# EAGLE board Qwiic_ATECC608A-Panel (EAGLE 9.5.1)
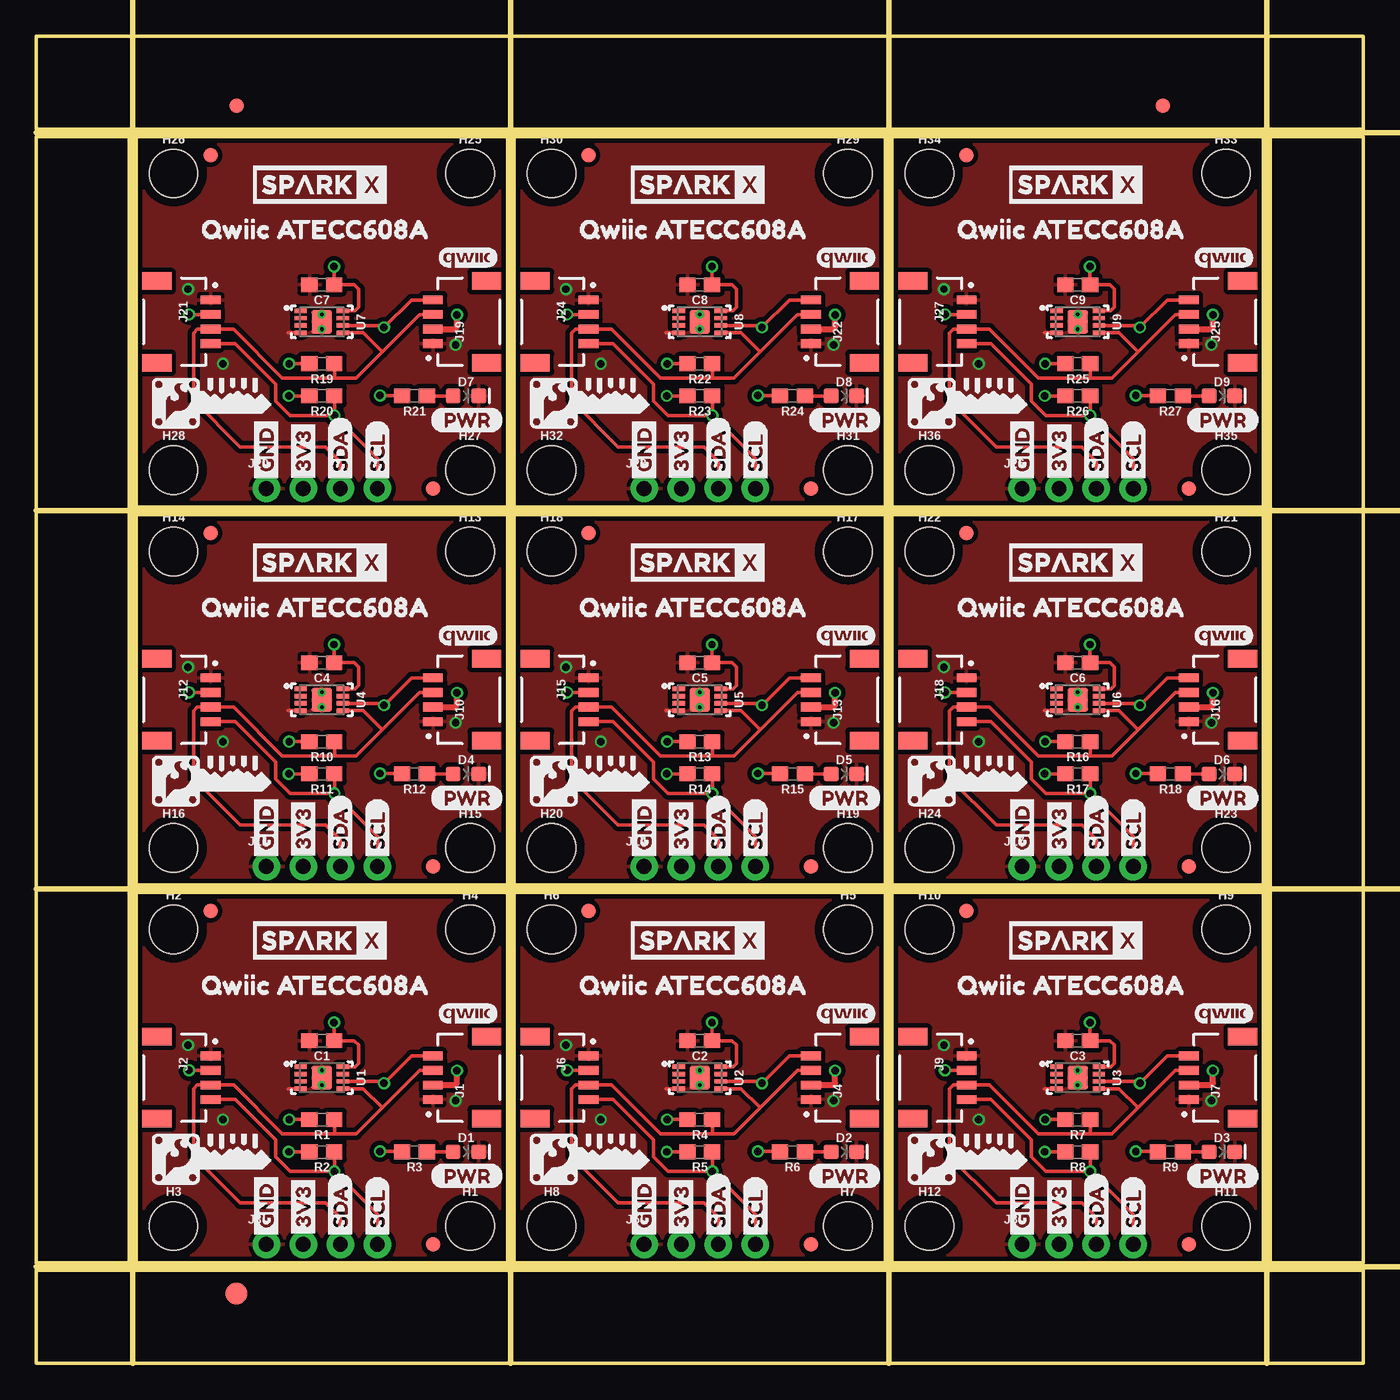
[diagram p0: board, top side]
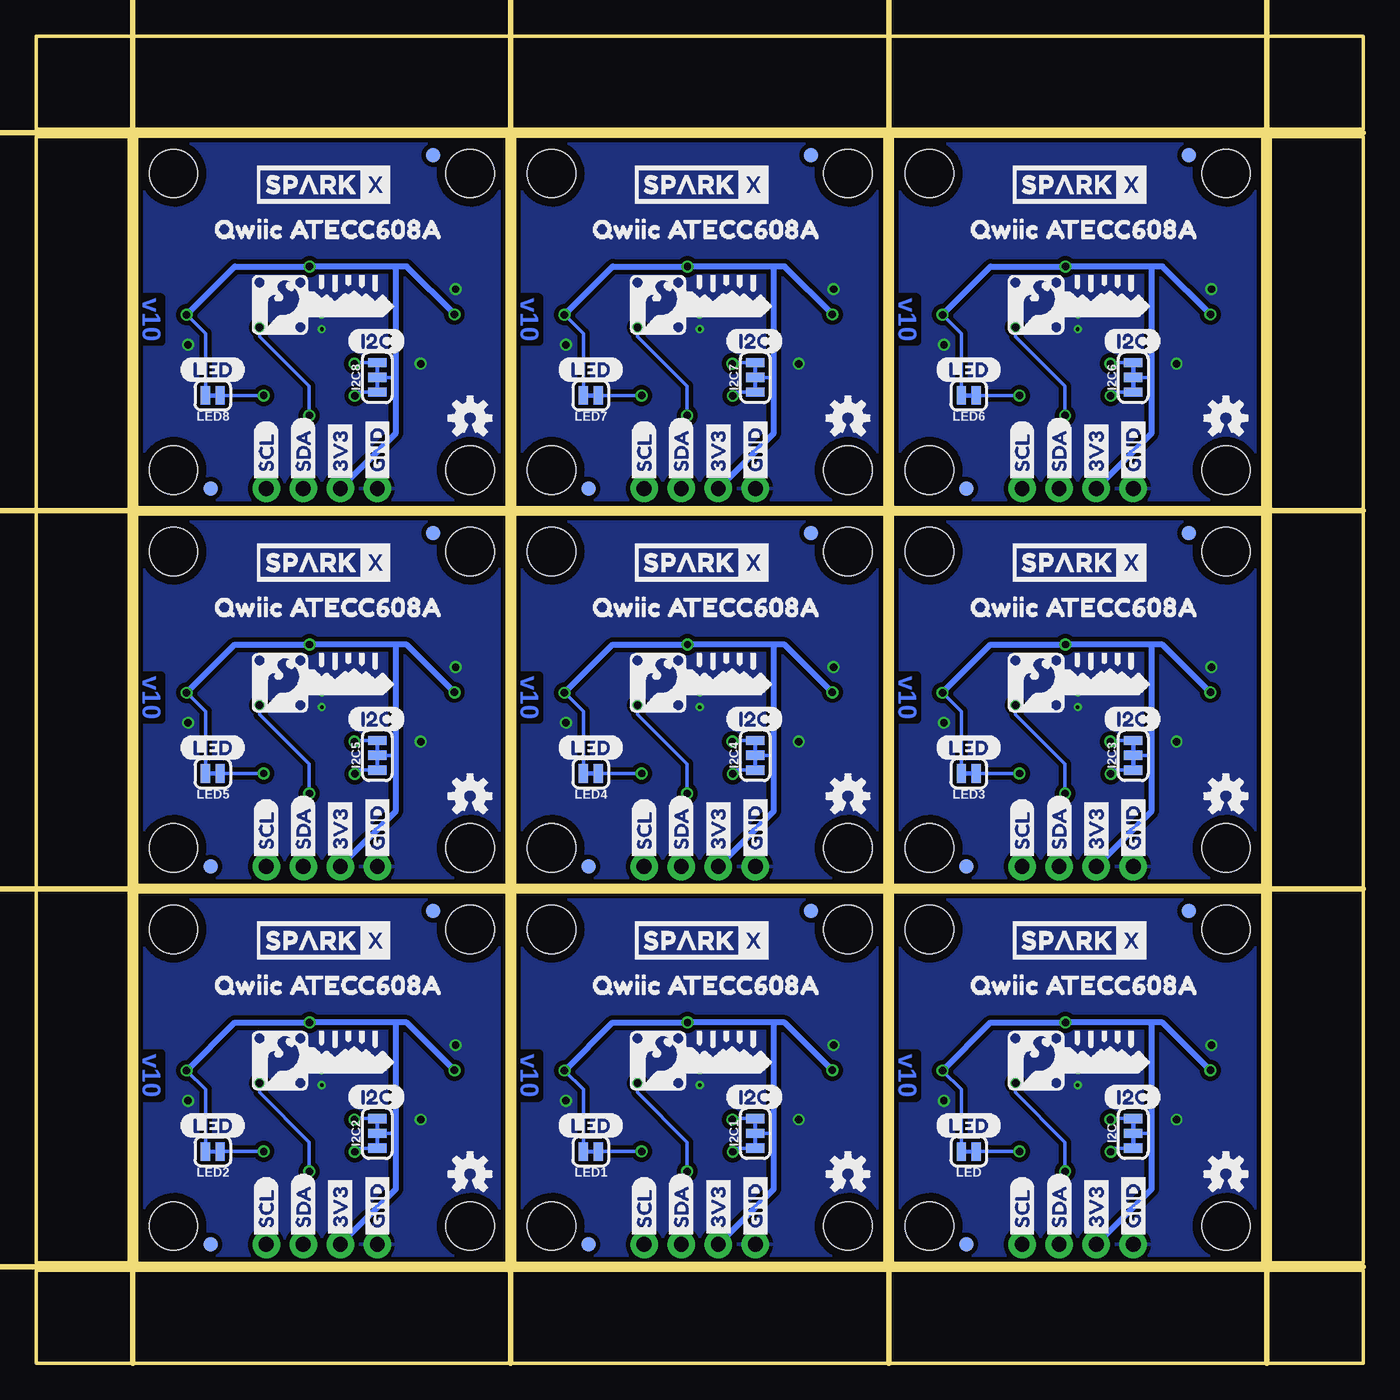
[diagram p1: board, bottom side, seen from below]

Size 90.93 x 90.93 mm. Coordinates in mm from the lower left corner, seen from the top.
Outline: 6.86,6.86 6.86,32.26 32.26,32.26 32.26,6.86 6.86,6.86
Outline: 32.77,6.86 32.77,32.26 58.17,32.26 58.17,6.86 32.77,6.86
Outline: 58.67,6.86 58.67,32.26 84.07,32.26 84.07,6.86 58.67,6.86
Outline: 6.86,32.77 6.86,58.17 32.26,58.17 32.26,32.77 6.86,32.77
Outline: 32.77,32.77 32.77,58.17 58.17,58.17 58.17,32.77 32.77,32.77
Outline: 58.67,32.77 58.67,58.17 84.07,58.17 84.07,32.77 58.67,32.77
Outline: 6.86,58.67 6.86,84.07 32.26,84.07 32.26,58.67 6.86,58.67
Outline: 32.77,58.67 32.77,84.07 58.17,84.07 58.17,58.67 32.77,58.67
Outline: 58.67,58.67 58.67,84.07 84.07,84.07 84.07,58.67 58.67,58.67
Outline: 0,6.35 90.93,6.35 90.93,0 0,0 0,6.35
Outline: 84.58,84.07 90.93,84.07 90.93,6.86 84.58,6.86 84.58,84.07
Outline: 0,90.93 90.93,90.93 90.93,84.58 0,84.58 0,90.93
Outline: 0,84.07 6.35,84.07 6.35,6.86 0,6.86 0,84.07
Copper layers (1*16): Top 0.035mm / dielectric 1.5mm / Bottom 0.035mm
Design rules "SparkFun-2-layer-PCBWay-LIMIT": minimum track width 6mil, minimum drill 0.3mm, track to track 6mil, track to pad 6mil, pad to pad 6mil, via to via 6mil, smd to smd 6mil, copper to edge 6mil, drill to drill 6mil, minimum pad ring 6mil, minimum via ring 6mil, stop-mask expansion 4mil, vias tented up to drill 25mil, thermal gap 10mil
tRestrict: area 17.9,18.6 to 18.3,18.6; area 43.8,18.6 to 44.2,18.6; area 69.7,18.6 to 70.1,18.6; area 17.9,44.5 to 18.3,44.6; area 43.8,44.5 to 44.2,44.6; area 69.7,44.5 to 70.1,44.6; area 17.9,70.4 to 18.3,70.5; area 43.8,70.4 to 44.2,70.5; area 69.7,70.4 to 70.1,70.5
Milling: 8 lines

## Footprints (pad centres in the part's own frame; a part is rotated, then mirrored left to right if it is on the bottom)
0603 = smd 1.1 x 1: 1 -0.85,0; 2 0.85,0
LED-0603 = smd 1 x 1: A -0.877,0; C 0.877,0
FIDUCIAL-1X2 = smd 1 x 1: 1 0,0
FIDUCIAL-1.5X3 = smd 1.5 x 1.5: 1 0,0
STAND-OFF = hole 3.302: 0,0
SMT-JUMPER_3_2-NC_TRACE_SILK = smd 0.635 x 1.27: 1 -1.016,0; 2 0,0; 3 1.016,0
JST04_1MM_RA = smd 0.6 x 1.35: 1 -1.5,0; 2 -0.5,0; 3 0.5,0; 4 1.5,0 | smd 1.2 x 2: NC1 2.8,-3.675; NC2 -2.8,-3.675
1X04_NO_SILK = drill 1.016 pad 1.88: 1 0,0; 2 2.54,0; 3 5.08,0; 4 7.62,0
SMT-JUMPER_2_NC_TRACE_SILK = smd 0.635 x 1.27: 1 -0.508,0; 2 0.508,0
UDFN_2X3MM = smd 0.3 x 0.85: 1 -0.75,-1.45; 2 -0.25,-1.45; 3 0.25,-1.45; 4 0.75,-1.45; 5 0.75,1.45; 6 0.25,1.45; 7 -0.25,1.45; 8 -0.75,1.45 | smd 1.6 x 1.4: P 0,0

## Placement (x,y rotation side)
C1  0.1uF  [0603]  19.56,22.1 180 top
C2  0.1uF  [0603]  45.47,22.1 180 top
C3  0.1uF  [0603]  71.37,22.1 180 top
C4  0.1uF  [0603]  19.56,48.01 180 top
C5  0.1uF  [0603]  45.47,48.01 180 top
C6  0.1uF  [0603]  71.37,48.01 180 top
C7  0.1uF  [0603]  19.56,73.91 180 top
C8  0.1uF  [0603]  45.47,73.91 180 top
C9  0.1uF  [0603]  71.37,73.91 180 top
D1  RED  [LED-0603]  29.44,14.48 0 top
D2  RED  [LED-0603]  55.35,14.48 0 top
D3  RED  [LED-0603]  81.25,14.48 0 top
D4  RED  [LED-0603]  29.44,40.39 0 top
D5  RED  [LED-0603]  55.35,40.39 0 top
D6  RED  [LED-0603]  81.25,40.39 0 top
D7  RED  [LED-0603]  29.44,66.29 0 top
D8  RED  [LED-0603]  55.35,66.29 0 top
D9  RED  [LED-0603]  81.25,66.29 0 top
E$1  [FIDUCIAL-1X2]  13.72,86.17 0 top
E$2  [FIDUCIAL-1X2]  77.22,86.17 0 top
E$3  [FIDUCIAL-1.5X3]  13.72,4.76 0 top
FD1  FIDUCIAL1X2  [FIDUCIAL-1X2]  11.94,30.99 0 top
FD2  FIDUCIAL1X2  [FIDUCIAL-1X2]  27.18,8.13 0 top
FD3  FIDUCIAL1X2  [FIDUCIAL-1X2]  27.18,8.13 0 bottom
FD4  FIDUCIAL1X2  [FIDUCIAL-1X2]  11.94,30.99 0 bottom
FD5  FIDUCIAL1X2  [FIDUCIAL-1X2]  37.85,30.99 0 top
FD6  FIDUCIAL1X2  [FIDUCIAL-1X2]  53.09,8.13 0 top
FD7  FIDUCIAL1X2  [FIDUCIAL-1X2]  53.09,8.13 0 bottom
FD8  FIDUCIAL1X2  [FIDUCIAL-1X2]  37.85,30.99 0 bottom
FD9  FIDUCIAL1X2  [FIDUCIAL-1X2]  63.75,30.99 0 top
FD10  FIDUCIAL1X2  [FIDUCIAL-1X2]  78.99,8.13 0 top
FD11  FIDUCIAL1X2  [FIDUCIAL-1X2]  78.99,8.13 0 bottom
FD12  FIDUCIAL1X2  [FIDUCIAL-1X2]  63.75,30.99 0 bottom
FD13  FIDUCIAL1X2  [FIDUCIAL-1X2]  11.94,56.9 0 top
FD14  FIDUCIAL1X2  [FIDUCIAL-1X2]  27.18,34.04 0 top
FD15  FIDUCIAL1X2  [FIDUCIAL-1X2]  27.18,34.04 0 bottom
FD16  FIDUCIAL1X2  [FIDUCIAL-1X2]  11.94,56.9 0 bottom
FD17  FIDUCIAL1X2  [FIDUCIAL-1X2]  37.85,56.9 0 top
FD18  FIDUCIAL1X2  [FIDUCIAL-1X2]  53.09,34.04 0 top
FD19  FIDUCIAL1X2  [FIDUCIAL-1X2]  53.09,34.04 0 bottom
FD20  FIDUCIAL1X2  [FIDUCIAL-1X2]  37.85,56.9 0 bottom
FD21  FIDUCIAL1X2  [FIDUCIAL-1X2]  63.75,56.9 0 top
FD22  FIDUCIAL1X2  [FIDUCIAL-1X2]  78.99,34.04 0 top
FD23  FIDUCIAL1X2  [FIDUCIAL-1X2]  78.99,34.04 0 bottom
FD24  FIDUCIAL1X2  [FIDUCIAL-1X2]  63.75,56.9 0 bottom
FD25  FIDUCIAL1X2  [FIDUCIAL-1X2]  11.94,82.8 0 top
FD26  FIDUCIAL1X2  [FIDUCIAL-1X2]  27.18,59.94 0 top
FD27  FIDUCIAL1X2  [FIDUCIAL-1X2]  27.18,59.94 0 bottom
FD28  FIDUCIAL1X2  [FIDUCIAL-1X2]  11.94,82.8 0 bottom
FD29  FIDUCIAL1X2  [FIDUCIAL-1X2]  37.85,82.8 0 top
FD30  FIDUCIAL1X2  [FIDUCIAL-1X2]  53.09,59.94 0 top
FD31  FIDUCIAL1X2  [FIDUCIAL-1X2]  53.09,59.94 0 bottom
FD32  FIDUCIAL1X2  [FIDUCIAL-1X2]  37.85,82.8 0 bottom
FD33  FIDUCIAL1X2  [FIDUCIAL-1X2]  63.75,82.8 0 top
FD34  FIDUCIAL1X2  [FIDUCIAL-1X2]  78.99,59.94 0 top
FD35  FIDUCIAL1X2  [FIDUCIAL-1X2]  78.99,59.94 0 bottom
FD36  FIDUCIAL1X2  [FIDUCIAL-1X2]  63.75,82.8 0 bottom
H1  STAND-OFF  [STAND-OFF]  29.72,9.4 0 top
H2  STAND-OFF  [STAND-OFF]  9.4,29.72 0 top
H3  STAND-OFF  [STAND-OFF]  9.4,9.4 0 top
H4  STAND-OFF  [STAND-OFF]  29.72,29.72 0 top
H5  STAND-OFF  [STAND-OFF]  55.63,29.72 0 top
H6  STAND-OFF  [STAND-OFF]  35.31,29.72 0 top
H7  STAND-OFF  [STAND-OFF]  55.63,9.4 0 top
H8  STAND-OFF  [STAND-OFF]  35.31,9.4 0 top
H9  STAND-OFF  [STAND-OFF]  81.53,29.72 0 top
H10  STAND-OFF  [STAND-OFF]  61.21,29.72 0 top
H11  STAND-OFF  [STAND-OFF]  81.53,9.4 0 top
H12  STAND-OFF  [STAND-OFF]  61.21,9.4 0 top
H13  STAND-OFF  [STAND-OFF]  29.72,55.63 0 top
H14  STAND-OFF  [STAND-OFF]  9.4,55.63 0 top
H15  STAND-OFF  [STAND-OFF]  29.72,35.31 0 top
H16  STAND-OFF  [STAND-OFF]  9.4,35.31 0 top
H17  STAND-OFF  [STAND-OFF]  55.63,55.63 0 top
H18  STAND-OFF  [STAND-OFF]  35.31,55.63 0 top
H19  STAND-OFF  [STAND-OFF]  55.63,35.31 0 top
H20  STAND-OFF  [STAND-OFF]  35.31,35.31 0 top
H21  STAND-OFF  [STAND-OFF]  81.53,55.63 0 top
H22  STAND-OFF  [STAND-OFF]  61.21,55.63 0 top
H23  STAND-OFF  [STAND-OFF]  81.53,35.31 0 top
H24  STAND-OFF  [STAND-OFF]  61.21,35.31 0 top
H25  STAND-OFF  [STAND-OFF]  29.72,81.53 0 top
H26  STAND-OFF  [STAND-OFF]  9.4,81.53 0 top
H27  STAND-OFF  [STAND-OFF]  29.72,61.21 0 top
H28  STAND-OFF  [STAND-OFF]  9.4,61.21 0 top
H29  STAND-OFF  [STAND-OFF]  55.63,81.53 0 top
H30  STAND-OFF  [STAND-OFF]  35.31,81.53 0 top
H31  STAND-OFF  [STAND-OFF]  55.63,61.21 0 top
H32  STAND-OFF  [STAND-OFF]  35.31,61.21 0 top
H33  STAND-OFF  [STAND-OFF]  81.53,81.53 0 top
H34  STAND-OFF  [STAND-OFF]  61.21,81.53 0 top
H35  STAND-OFF  [STAND-OFF]  81.53,61.21 0 top
H36  STAND-OFF  [STAND-OFF]  61.21,61.21 0 top
I2C  [SMT-JUMPER_3_2-NC_TRACE_SILK]  15.75,15.75 90 bottom
I2C1  [SMT-JUMPER_3_2-NC_TRACE_SILK]  41.66,15.75 90 bottom
I2C2  [SMT-JUMPER_3_2-NC_TRACE_SILK]  67.56,15.75 90 bottom
I2C3  [SMT-JUMPER_3_2-NC_TRACE_SILK]  15.75,41.66 90 bottom
I2C4  [SMT-JUMPER_3_2-NC_TRACE_SILK]  41.66,41.66 90 bottom
I2C5  [SMT-JUMPER_3_2-NC_TRACE_SILK]  67.56,41.66 90 bottom
I2C6  [SMT-JUMPER_3_2-NC_TRACE_SILK]  15.75,67.56 90 bottom
I2C7  [SMT-JUMPER_3_2-NC_TRACE_SILK]  41.66,67.56 90 bottom
I2C8  [SMT-JUMPER_3_2-NC_TRACE_SILK]  67.56,67.56 90 bottom
J1  QWIIC  [JST04_1MM_RA]  27.18,19.56 90 top
J2  QWIIC  [JST04_1MM_RA]  11.94,19.56 270 top
J3  PTH  [1X04_NO_SILK]  15.75,8.13 0 top
J4  QWIIC  [JST04_1MM_RA]  53.09,19.56 90 top
J5  PTH  [1X04_NO_SILK]  41.66,8.13 0 top
J6  QWIIC  [JST04_1MM_RA]  37.85,19.56 270 top
J7  QWIIC  [JST04_1MM_RA]  78.99,19.56 90 top
J8  PTH  [1X04_NO_SILK]  67.56,8.13 0 top
J9  QWIIC  [JST04_1MM_RA]  63.75,19.56 270 top
J10  QWIIC  [JST04_1MM_RA]  27.18,45.47 90 top
J11  PTH  [1X04_NO_SILK]  15.75,34.04 0 top
J12  QWIIC  [JST04_1MM_RA]  11.94,45.47 270 top
J13  QWIIC  [JST04_1MM_RA]  53.09,45.47 90 top
J14  PTH  [1X04_NO_SILK]  41.66,34.04 0 top
J15  QWIIC  [JST04_1MM_RA]  37.85,45.47 270 top
J16  QWIIC  [JST04_1MM_RA]  78.99,45.47 90 top
J17  PTH  [1X04_NO_SILK]  67.56,34.04 0 top
J18  QWIIC  [JST04_1MM_RA]  63.75,45.47 270 top
J19  QWIIC  [JST04_1MM_RA]  27.18,71.37 90 top
J20  PTH  [1X04_NO_SILK]  15.75,59.94 0 top
J21  QWIIC  [JST04_1MM_RA]  11.94,71.37 270 top
J22  QWIIC  [JST04_1MM_RA]  53.09,71.37 90 top
J23  PTH  [1X04_NO_SILK]  41.66,59.94 0 top
J24  QWIIC  [JST04_1MM_RA]  37.85,71.37 270 top
J25  QWIIC  [JST04_1MM_RA]  78.99,71.37 90 top
J26  PTH  [1X04_NO_SILK]  67.56,59.94 0 top
J27  QWIIC  [JST04_1MM_RA]  63.75,71.37 270 top
LED  [SMT-JUMPER_2_NC_TRACE_SILK]  27.03,14.5 180 bottom
LED1  [SMT-JUMPER_2_NC_TRACE_SILK]  52.93,14.5 180 bottom
LED2  [SMT-JUMPER_2_NC_TRACE_SILK]  78.84,14.5 180 bottom
LED3  [SMT-JUMPER_2_NC_TRACE_SILK]  27.03,40.41 180 bottom
LED4  [SMT-JUMPER_2_NC_TRACE_SILK]  52.93,40.41 180 bottom
LED5  [SMT-JUMPER_2_NC_TRACE_SILK]  78.84,40.41 180 bottom
LED6  [SMT-JUMPER_2_NC_TRACE_SILK]  27.03,66.32 180 bottom
LED7  [SMT-JUMPER_2_NC_TRACE_SILK]  52.93,66.32 180 bottom
LED8  [SMT-JUMPER_2_NC_TRACE_SILK]  78.84,66.32 180 bottom
LOGO1  OSHW-LOGOS  [OSHW-LOGO-S]  35.31,12.95 0 bottom
LOGO2  OSHW-LOGOS  [OSHW-LOGO-S]  61.21,12.95 0 bottom
LOGO3  OSHW-LOGOS  [OSHW-LOGO-S]  9.4,38.86 0 bottom
LOGO4  OSHW-LOGOS  [OSHW-LOGO-S]  9.4,12.95 0 bottom
LOGO5  OSHW-LOGOS  [OSHW-LOGO-S]  35.31,38.86 0 bottom
LOGO6  OSHW-LOGOS  [OSHW-LOGO-S]  61.21,38.86 0 bottom
LOGO7  OSHW-LOGOS  [OSHW-LOGO-S]  9.4,64.77 0 bottom
LOGO8  OSHW-LOGOS  [OSHW-LOGO-S]  35.31,64.77 0 bottom
LOGO9  OSHW-LOGOS  [OSHW-LOGO-S]  61.21,64.77 0 bottom
R1  4.7k  [0603]  19.56,16.69 180 top
R2  4.7k  [0603]  19.56,14.48 180 top
R3  1k  [0603]  25.91,14.48 180 top
R4  4.7k  [0603]  45.47,16.69 180 top
R5  4.7k  [0603]  45.47,14.48 180 top
R6  1k  [0603]  51.82,14.48 180 top
R7  4.7k  [0603]  71.37,16.69 180 top
R8  4.7k  [0603]  71.37,14.48 180 top
R9  1k  [0603]  77.72,14.48 180 top
R10  4.7k  [0603]  19.56,42.6 180 top
R11  4.7k  [0603]  19.56,40.39 180 top
R12  1k  [0603]  25.91,40.39 180 top
R13  4.7k  [0603]  45.47,42.6 180 top
R14  4.7k  [0603]  45.47,40.39 180 top
R15  1k  [0603]  51.82,40.39 180 top
R16  4.7k  [0603]  71.37,42.6 180 top
R17  4.7k  [0603]  71.37,40.39 180 top
R18  1k  [0603]  77.72,40.39 180 top
R19  4.7k  [0603]  19.56,68.5 180 top
R20  4.7k  [0603]  19.56,66.29 180 top
R21  1k  [0603]  25.91,66.29 180 top
R22  4.7k  [0603]  45.47,68.5 180 top
R23  4.7k  [0603]  45.47,66.29 180 top
R24  1k  [0603]  51.82,66.29 180 top
R25  4.7k  [0603]  71.37,68.5 180 top
R26  4.7k  [0603]  71.37,66.29 180 top
R27  1k  [0603]  77.72,66.29 180 top
U1  ATECC608A  [UDFN_2X3MM]  19.56,19.56 270 top
U2  ATECC608A  [UDFN_2X3MM]  45.47,19.56 270 top
U3  ATECC608A  [UDFN_2X3MM]  71.37,19.56 270 top
U4  ATECC608A  [UDFN_2X3MM]  19.56,45.47 270 top
U5  ATECC608A  [UDFN_2X3MM]  45.47,45.47 270 top
U6  ATECC608A  [UDFN_2X3MM]  71.37,45.47 270 top
U7  ATECC608A  [UDFN_2X3MM]  19.56,71.37 270 top
U8  ATECC608A  [UDFN_2X3MM]  45.47,71.37 270 top
U9  ATECC608A  [UDFN_2X3MM]  71.37,71.37 270 top
U$1  [LED0]  29.34,16.28 0 bottom
U$2  [3V34]  18.29,8.36 90 top
U$3  [SDA5]  20.83,8.36 90 bottom
U$4  [GND3]  15.75,8.36 90 top
U$5  [SDA5]  20.83,8.36 90 top
U$6  [SCL6]  23.37,8.36 90 top
U$7  [3V34]  18.29,8.36 90 bottom
U$8  [GND3]  15.75,8.36 90 bottom
U$9  [SPARKX-MEDIUM]  19.43,28.96 0 bottom
U$10  [SCL6]  23.37,8.36 90 bottom
U$11  [QWIIC_ATECC608A0]  10.16,25.91 0 top
U$12  [QWIIC_ATECC608A0]  28.07,25.91 0 bottom
U$13  [PWR0]  27,12.83 0 top
U$14  [QWIIC_4MM]  55.5,23.95 0 top
U$15  [CRYPTO_COPROCESSOR_LOGO#04#PNG]  19.56,20.83 0 bottom
U$16  [QWIIC_4MM]  29.59,23.95 0 top
U$17  [PWR0]  52.91,12.83 0 top
U$18  [CRYPTO_COPROCESSOR_LOGO#04#PNG]  11.94,14.07 0 top
U$19  [SPARKX-MEDIUM]  19.43,28.96 0 top
U$20  [I2C0]  43.74,18.24 0 bottom
U$21  [3V34]  44.2,8.36 90 top
U$22  [I2C0]  17.83,18.24 0 bottom
U$23  [GND3]  41.66,8.36 90 top
U$24  [SDA5]  46.74,8.36 90 top
U$25  [SCL6]  49.28,8.36 90 top
U$26  [3V34]  44.2,8.36 90 bottom
U$27  [GND3]  41.66,8.36 90 bottom
U$28  [LED0]  55.24,16.28 0 bottom
U$29  [SDA5]  46.74,8.36 90 bottom
U$30  [SCL6]  49.28,8.36 90 bottom
U$31  [CRYPTO_COPROCESSOR_LOGO#04#PNG]  45.47,20.83 0 bottom
U$32  [CRYPTO_COPROCESSOR_LOGO#04#PNG]  37.85,14.07 0 top
U$33  [SPARKX-MEDIUM]  45.34,28.96 0 bottom
U$34  [SPARKX-MEDIUM]  45.34,28.96 0 top
U$35  [QWIIC_ATECC608A0]  36.07,25.91 0 top
U$36  [QWIIC_ATECC608A0]  53.97,25.91 0 bottom
U$37  [QWIIC_4MM]  81.41,23.95 0 top
U$38  [PWR0]  78.82,12.83 0 top
U$39  [I2C0]  69.65,18.24 0 bottom
U$40  [3V34]  70.1,8.36 90 top
U$41  [GND3]  67.56,8.36 90 top
U$42  [SDA5]  72.64,8.36 90 top
U$43  [SCL6]  75.18,8.36 90 top
U$44  [3V34]  70.1,8.36 90 bottom
U$45  [GND3]  67.56,8.36 90 bottom
U$46  [LED0]  81.15,16.28 0 bottom
U$47  [SDA5]  72.64,8.36 90 bottom
U$48  [SCL6]  75.18,8.36 90 bottom
U$49  [CRYPTO_COPROCESSOR_LOGO#04#PNG]  71.37,20.83 0 bottom
U$50  [CRYPTO_COPROCESSOR_LOGO#04#PNG]  63.75,14.07 0 top
U$51  [SPARKX-MEDIUM]  71.25,28.96 0 bottom
U$52  [SPARKX-MEDIUM]  71.25,28.96 0 top
U$53  [QWIIC_ATECC608A0]  61.98,25.91 0 top
U$54  [QWIIC_ATECC608A0]  79.88,25.91 0 bottom
U$55  [QWIIC_4MM]  29.59,49.86 0 top
U$56  [PWR0]  27,38.73 0 top
U$57  [I2C0]  17.83,44.15 0 bottom
U$58  [3V34]  18.29,34.26 90 top
U$59  [GND3]  15.75,34.26 90 top
U$60  [SDA5]  20.83,34.26 90 top
U$61  [SCL6]  23.37,34.26 90 top
U$62  [3V34]  18.29,34.26 90 bottom
U$63  [GND3]  15.75,34.26 90 bottom
U$64  [LED0]  29.34,42.19 0 bottom
U$65  [SDA5]  20.83,34.26 90 bottom
U$66  [SCL6]  23.37,34.26 90 bottom
U$67  [CRYPTO_COPROCESSOR_LOGO#04#PNG]  19.56,46.74 0 bottom
U$68  [CRYPTO_COPROCESSOR_LOGO#04#PNG]  11.94,39.98 0 top
U$69  [SPARKX-MEDIUM]  19.43,54.86 0 bottom
U$70  [SPARKX-MEDIUM]  19.43,54.86 0 top
U$71  [QWIIC_ATECC608A0]  10.16,51.82 0 top
U$72  [QWIIC_ATECC608A0]  28.07,51.82 0 bottom
U$73  [QWIIC_4MM]  55.5,49.86 0 top
U$74  [PWR0]  52.91,38.73 0 top
U$75  [I2C0]  43.74,44.15 0 bottom
U$76  [3V34]  44.2,34.26 90 top
U$77  [GND3]  41.66,34.26 90 top
U$78  [SDA5]  46.74,34.26 90 top
U$79  [SCL6]  49.28,34.26 90 top
U$80  [3V34]  44.2,34.26 90 bottom
U$81  [GND3]  41.66,34.26 90 bottom
U$82  [LED0]  55.24,42.19 0 bottom
U$83  [SDA5]  46.74,34.26 90 bottom
U$84  [SCL6]  49.28,34.26 90 bottom
U$85  [CRYPTO_COPROCESSOR_LOGO#04#PNG]  45.47,46.74 0 bottom
U$86  [CRYPTO_COPROCESSOR_LOGO#04#PNG]  37.85,39.98 0 top
U$87  [SPARKX-MEDIUM]  45.34,54.86 0 bottom
U$88  [SPARKX-MEDIUM]  45.34,54.86 0 top
U$89  [QWIIC_ATECC608A0]  36.07,51.82 0 top
U$90  [QWIIC_ATECC608A0]  53.97,51.82 0 bottom
U$91  [QWIIC_4MM]  81.41,49.86 0 top
U$92  [PWR0]  78.82,38.73 0 top
U$93  [I2C0]  69.65,44.15 0 bottom
U$94  [3V34]  70.1,34.26 90 top
U$95  [GND3]  67.56,34.26 90 top
U$96  [SDA5]  72.64,34.26 90 top
U$97  [SCL6]  75.18,34.26 90 top
U$98  [3V34]  70.1,34.26 90 bottom
U$99  [GND3]  67.56,34.26 90 bottom
U$100  [LED0]  81.15,42.19 0 bottom
U$101  [SDA5]  72.64,34.26 90 bottom
U$102  [SCL6]  75.18,34.26 90 bottom
U$103  [CRYPTO_COPROCESSOR_LOGO#04#PNG]  71.37,46.74 0 bottom
U$104  [CRYPTO_COPROCESSOR_LOGO#04#PNG]  63.75,39.98 0 top
U$105  [SPARKX-MEDIUM]  71.25,54.86 0 bottom
U$106  [SPARKX-MEDIUM]  71.25,54.86 0 top
U$107  [QWIIC_ATECC608A0]  61.98,51.82 0 top
U$108  [QWIIC_ATECC608A0]  79.88,51.82 0 bottom
U$109  [QWIIC_4MM]  29.59,75.77 0 top
U$110  [PWR0]  27,64.64 0 top
U$111  [I2C0]  17.83,70.05 0 bottom
U$112  [3V34]  18.29,60.17 90 top
U$113  [GND3]  15.75,60.17 90 top
U$114  [SDA5]  20.83,60.17 90 top
U$115  [SCL6]  23.37,60.17 90 top
U$116  [3V34]  18.29,60.17 90 bottom
U$117  [GND3]  15.75,60.17 90 bottom
U$118  [LED0]  29.34,68.1 0 bottom
U$119  [SDA5]  20.83,60.17 90 bottom
U$120  [SCL6]  23.37,60.17 90 bottom
U$121  [CRYPTO_COPROCESSOR_LOGO#04#PNG]  19.56,72.64 0 bottom
U$122  [CRYPTO_COPROCESSOR_LOGO#04#PNG]  11.94,65.89 0 top
U$123  [SPARKX-MEDIUM]  19.43,80.77 0 bottom
U$124  [SPARKX-MEDIUM]  19.43,80.77 0 top
U$125  [QWIIC_ATECC608A0]  10.16,77.72 0 top
U$126  [QWIIC_ATECC608A0]  28.07,77.72 0 bottom
U$127  [QWIIC_4MM]  55.5,75.77 0 top
U$128  [PWR0]  52.91,64.64 0 top
U$129  [I2C0]  43.74,70.05 0 bottom
U$130  [3V34]  44.2,60.17 90 top
U$131  [GND3]  41.66,60.17 90 top
U$132  [SDA5]  46.74,60.17 90 top
U$133  [SCL6]  49.28,60.17 90 top
U$134  [3V34]  44.2,60.17 90 bottom
U$135  [GND3]  41.66,60.17 90 bottom
U$136  [LED0]  55.24,68.1 0 bottom
U$137  [SDA5]  46.74,60.17 90 bottom
U$138  [SCL6]  49.28,60.17 90 bottom
U$139  [CRYPTO_COPROCESSOR_LOGO#04#PNG]  45.47,72.64 0 bottom
U$140  [CRYPTO_COPROCESSOR_LOGO#04#PNG]  37.85,65.89 0 top
U$141  [SPARKX-MEDIUM]  45.34,80.77 0 bottom
U$142  [SPARKX-MEDIUM]  45.34,80.77 0 top
U$143  [QWIIC_ATECC608A0]  36.07,77.72 0 top
U$144  [QWIIC_ATECC608A0]  53.97,77.72 0 bottom
U$145  [QWIIC_4MM]  81.41,75.77 0 top
U$146  [PWR0]  78.82,64.64 0 top
U$147  [I2C0]  69.65,70.05 0 bottom
U$148  [3V34]  70.1,60.17 90 top
U$149  [GND3]  67.56,60.17 90 top
U$150  [SDA5]  72.64,60.17 90 top
U$151  [SCL6]  75.18,60.17 90 top
U$152  [3V34]  70.1,60.17 90 bottom
U$153  [GND3]  67.56,60.17 90 bottom
U$154  [LED0]  81.15,68.1 0 bottom
U$155  [SDA5]  72.64,60.17 90 bottom
U$156  [SCL6]  75.18,60.17 90 bottom
U$157  [CRYPTO_COPROCESSOR_LOGO#04#PNG]  71.37,72.64 0 bottom
U$158  [CRYPTO_COPROCESSOR_LOGO#04#PNG]  63.75,65.89 0 top
U$159  [SPARKX-MEDIUM]  71.25,80.77 0 bottom
U$160  [SPARKX-MEDIUM]  71.25,80.77 0 top
U$161  [QWIIC_ATECC608A0]  61.98,77.72 0 top
U$162  [QWIIC_ATECC608A0]  79.88,77.72 0 bottom

## Library data of the parts
C1-C9 = SparkFun-Capacitors; PROD_ID: CAP-00810
D1-D9 = SparkFun-LED; PROD_ID: DIO-00819
E$1 E$2 FD1-FD36 LOGO1-LOGO9 U$14 U$16 U$37 U$55 U$73 U$91 U$109 U$127 U$145 = SparkFun-Aesthetics
E$3 = SparkFun-Retired
H1-H36 = SparkFun-Hardware
I2C I2C1-I2C8 LED LED1-LED8 = SparkFun-Jumpers
J1 J2 J4 J6 J7 J9 J10 J12 J13 J15 J16 J18 J19 J21 J22 J24 J25 J27 = SparkFun-Connectors; PROD_ID: CONN-13694
J3 J5 J8 J11 J14 J17 J20 J23 J26 = SparkFun-Connectors
R1 R2 R4 R5 R7 R8 R10 R11 R13 R14 R16 R17 R19 R20 R22 R23 R25 R26 = SparkFun-Resistors; PROD_ID: RES-07857
R3 R6 R9 R12 R15 R18 R21 R24 R27 = SparkFun-Resistors; PROD_ID: RES-07856
U1-U9 = ATECC608A; PROD_ID: SPX
U$1 U$28 U$46 U$64 U$82 U$100 U$118 U$136 U$154 = buzzard_labels (5)
U$2-U$8 U$10-U$12 U$21 U$23-U$27 U$29 U$30 U$35 U$36 U$40-U$45 U$47 U$48 U$53 U$54 U$58-U$63 U$65 U$66 U$71 U$72 U$76-U$81 U$83 U$84 U$89 U$90 U$94-U$99 U$101 U$102 U$107 U$108 U$112-U$117 U$119 U$120 U$125 U$126 U$130-U$135 U$137 U$138 U$143 U$144 U$148-U$153 U$155 U$156 U$161 U$162 = buzzard_labels
U$9 U$19 U$33 U$34 U$51 U$52 U$69 U$70 U$87 U$88 U$105 U$106 U$123 U$124 U$141 U$142 U$159 U$160 = SparkX
U$13 U$17 U$38 U$56 U$74 U$92 U$110 U$128 U$146 = buzzard_labels (1)
U$15 U$31 U$49 U$67 U$85 U$103 U$121 U$139 U$157 = crypto_coprocessor_logo#04#png (1)
U$18 U$32 U$50 U$68 U$86 U$104 U$122 U$140 U$158 = crypto_coprocessor_logo#04#png (2)
U$20 U$22 U$39 U$57 U$75 U$93 U$111 U$129 U$147 = buzzard_labels (3)

## Nets
3.3V: C1.1 I2C.2 J1.2 J2.2 J3.2 LED.2 U1.8
3.3V1: C2.1 I2C1.2 J4.2 J5.2 J6.2 LED1.2 U2.8
3.3V2: C3.1 I2C2.2 J7.2 J8.2 J9.2 LED2.2 U3.8
3.3V3: C4.1 I2C3.2 J10.2 J11.2 J12.2 LED3.2 U4.8
3.3V4: C5.1 I2C4.2 J13.2 J14.2 J15.2 LED4.2 U5.8
3.3V5: C6.1 I2C5.2 J16.2 J17.2 J18.2 LED5.2 U6.8
3.3V6: C7.1 I2C6.2 J19.2 J20.2 J21.2 LED6.2 U7.8
3.3V7: C8.1 I2C7.2 J22.2 J23.2 J24.2 LED7.2 U8.8
3.3V8: C9.1 I2C8.2 J25.2 J26.2 J27.2 LED8.2 U9.8
GND: C1.2 D1.C J1.1 J2.1 J3.1 U1.4 U1.P
GND1: C2.2 D2.C J4.1 J5.1 J6.1 U2.4 U2.P
GND2: C3.2 D3.C J7.1 J8.1 J9.1 U3.4 U3.P
GND3: C4.2 D4.C J10.1 J11.1 J12.1 U4.4 U4.P
GND4: C5.2 D5.C J13.1 J14.1 J15.1 U5.4 U5.P
GND5: C6.2 D6.C J16.1 J17.1 J18.1 U6.4 U6.P
GND6: C7.2 D7.C J19.1 J20.1 J21.1 U7.4 U7.P
GND7: C8.2 D8.C J22.1 J23.1 J24.1 U8.4 U8.P
GND8: C9.2 D9.C J25.1 J26.1 J27.1 U9.4 U9.P
N$1: I2C1.3 R4.2
N$2: I2C1.1 R5.2
N$3: D1.A R3.1
N$4: I2C.3 R1.2
N$5: I2C.1 R2.2
N$6: D2.A R6.1
N$7: LED.1 R3.2
N$8: LED1.1 R6.2
N$9: I2C2.3 R7.2
N$10: I2C2.1 R8.2
N$11: D3.A R9.1
N$12: LED2.1 R9.2
N$13: I2C3.3 R10.2
N$14: I2C3.1 R11.2
N$15: D4.A R12.1
N$16: LED3.1 R12.2
N$17: I2C4.3 R13.2
N$18: I2C4.1 R14.2
N$19: D5.A R15.1
N$20: LED4.1 R15.2
N$21: I2C5.3 R16.2
N$22: I2C5.1 R17.2
N$23: D6.A R18.1
N$24: LED5.1 R18.2
N$25: I2C6.3 R19.2
N$26: I2C6.1 R20.2
N$27: D7.A R21.1
N$28: LED6.1 R21.2
N$29: I2C7.3 R22.2
N$30: I2C7.1 R23.2
N$31: D8.A R24.1
N$32: LED7.1 R24.2
N$33: I2C8.3 R25.2
N$34: I2C8.1 R26.2
N$35: D9.A R27.1
N$36: LED8.1 R27.2
SCL: J1.4 J2.4 J3.4 R2.1 U1.6
SCL1: J4.4 J5.4 J6.4 R5.1 U2.6
SCL2: J7.4 J8.4 J9.4 R8.1 U3.6
SCL3: J10.4 J11.4 J12.4 R11.1 U4.6
SCL4: J13.4 J14.4 J15.4 R14.1 U5.6
SCL5: J16.4 J17.4 J18.4 R17.1 U6.6
SCL6: J19.4 J20.4 J21.4 R20.1 U7.6
SCL7: J22.4 J23.4 J24.4 R23.1 U8.6
SCL8: J25.4 J26.4 J27.4 R26.1 U9.6
SDA: J1.3 J2.3 J3.3 R1.1 U1.5
SDA1: J4.3 J5.3 J6.3 R4.1 U2.5
SDA2: J7.3 J8.3 J9.3 R7.1 U3.5
SDA3: J10.3 J11.3 J12.3 R10.1 U4.5
SDA4: J13.3 J14.3 J15.3 R13.1 U5.5
SDA5: J16.3 J17.3 J18.3 R16.1 U6.5
SDA6: J19.3 J20.3 J21.3 R19.1 U7.5
SDA7: J22.3 J23.3 J24.3 R22.1 U8.5
SDA8: J25.3 J26.3 J27.3 R25.1 U9.5

## Tracks (layer width: path | path; a pad name or v marks a point on that pad's centre or on a via)
3.3V  (via drill 0.51)
  Top 0.254: v10.46,20.07 v10.47,20.06 J2.2 | U1.8 21.83,20.31 22.07,20.55 22.07,21.79 21.77,22.1 C1.1 v20.41,23.33 v20.4,23.34
  Top 0.406: J1.2 28.69,19.06 28.83,19.2 v28.83,20.04
  Bottom 0.254: LED.2 27.53,18.75 v28.83,20.04 | I2C.2 14.48,15.75
  Bottom 0.406: 14.48,23.34 13.74,23.34 v10.46,20.07 | 14.48,23.34 v20.4,23.34 25.53,23.34 v28.83,20.04 | J3.2 14.48,11.94 14.48,15.75 14.48,23.34
3.3V1  (via drill 0.51)
  Top 0.254: v36.37,20.07 36.38,20.06 J6.2 | U2.8 47.74,20.31 47.98,20.55 47.98,21.79 47.68,22.1 C2.1 v46.32,23.33 v46.3,23.34
  Top 0.406: J4.2 54.59,19.06 54.74,19.2 v54.74,20.04
  Bottom 0.254: LED1.2 53.44,18.75 v54.74,20.04 | I2C1.2 40.39,15.75
  Bottom 0.406: 40.39,23.34 39.65,23.34 v36.37,20.07 | 40.39,23.34 v46.3,23.34 51.43,23.34 v54.74,20.04 | J5.2 40.39,11.94 40.39,15.75 40.39,23.34
3.3V2  (via drill 0.51)
  Top 0.254: v62.28,20.07 v62.29,20.06 J9.2 | U3.8 73.65,20.31 73.89,20.55 73.89,21.79 73.58,22.1 C3.1 72.22,23.33 v72.21,23.34
  Top 0.406: J7.2 80.5,19.06 80.65,19.2 v80.65,20.04
  Bottom 0.254: LED2.2 79.35,18.75 v80.65,20.04 | I2C2.2 66.29,15.75
  Bottom 0.406: 66.29,23.34 65.56,23.34 v62.28,20.07 | 66.29,23.34 v72.21,23.34 77.34,23.34 v80.65,20.04 | J8.2 66.29,11.94 66.29,15.75 66.29,23.34
3.3V3  (via drill 0.51)
  Top 0.254: v10.46,45.97 10.47,45.97 J12.2 | U4.8 21.83,46.22 22.07,46.46 22.07,47.7 21.77,48.01 C4.1 v20.41,49.24 v20.4,49.25
  Top 0.406: J10.2 28.69,44.97 28.83,45.11 v28.83,45.95
  Bottom 0.254: LED3.2 27.53,44.65 v28.83,45.95 | I2C3.2 14.48,41.66
  Bottom 0.406: 14.48,49.25 13.74,49.25 v10.46,45.97 | 14.48,49.25 v20.4,49.25 25.53,49.25 v28.83,45.95 | J11.2 14.48,37.85 14.48,41.66 14.48,49.25
3.3V4  (via drill 0.51)
  Top 0.254: v36.37,45.97 36.38,45.97 J15.2 | U5.8 47.74,46.22 47.98,46.46 47.98,47.7 47.68,48.01 C5.1 v46.32,49.24 v46.3,49.25
  Top 0.406: J13.2 54.59,44.97 54.74,45.11 v54.74,45.95
  Bottom 0.254: LED4.2 53.44,44.65 v54.74,45.95 | I2C4.2 40.39,41.66
  Bottom 0.406: 40.39,49.25 39.65,49.25 v36.37,45.97 | 40.39,49.25 v46.3,49.25 51.43,49.25 v54.74,45.95 | J14.2 40.39,37.85 40.39,41.66 40.39,49.25
3.3V5  (via drill 0.51)
  Top 0.254: v62.28,45.97 62.29,45.97 J18.2 | U6.8 73.65,46.22 73.89,46.46 73.89,47.7 73.58,48.01 C6.1 72.22,49.24 v72.21,49.25
  Top 0.406: J16.2 80.5,44.97 80.65,45.11 v80.65,45.95
  Bottom 0.254: LED5.2 79.35,44.65 v80.65,45.95 | I2C5.2 66.29,41.66
  Bottom 0.406: 66.29,49.25 65.56,49.25 v62.28,45.97 | 66.29,49.25 v72.21,49.25 77.34,49.25 v80.65,45.95 | J17.2 66.29,37.85 66.29,41.66 66.29,49.25
3.3V6  (via drill 0.51)
  Top 0.254: v10.46,71.88 v10.47,71.87 J21.2 | U7.8 21.83,72.12 22.07,72.37 22.07,73.61 21.77,73.91 C7.1 v20.41,75.15 v20.4,75.16
  Top 0.406: J19.2 28.69,70.87 28.83,71.02 v28.83,71.86
  Bottom 0.254: LED6.2 27.53,70.56 v28.83,71.86 | I2C6.2 14.48,67.56
  Bottom 0.406: 14.48,75.16 13.74,75.16 v10.46,71.88 | 14.48,75.16 v20.4,75.16 25.53,75.16 v28.83,71.86 | J20.2 14.48,63.75 14.48,67.56 14.48,75.16
3.3V7  (via drill 0.51)
  Top 0.254: v36.37,71.88 36.38,71.87 J24.2 | U8.8 47.74,72.12 47.98,72.37 47.98,73.61 47.68,73.91 C8.1 v46.32,75.15 v46.3,75.16
  Top 0.406: J22.2 54.59,70.87 54.74,71.02 v54.74,71.86
  Bottom 0.254: LED7.2 53.44,70.56 v54.74,71.86 | I2C7.2 40.39,67.56
  Bottom 0.406: 40.39,75.16 39.65,75.16 v36.37,71.88 | 40.39,75.16 v46.3,75.16 51.43,75.16 v54.74,71.86 | J23.2 40.39,63.75 40.39,67.56 40.39,75.16
3.3V8  (via drill 0.51)
  Top 0.254: v62.28,71.88 v62.29,71.87 J27.2 | U9.8 73.65,72.12 73.89,72.37 73.89,73.61 73.58,73.91 C9.1 72.22,75.15 v72.21,75.16
  Top 0.406: J25.2 80.5,70.87 80.65,71.02 v80.65,71.86
  Bottom 0.254: LED8.2 79.35,70.56 v80.65,71.86 | I2C8.2 66.29,67.56
  Bottom 0.406: 66.29,75.16 65.56,75.16 v62.28,71.88 | 66.29,75.16 v72.21,75.16 77.34,75.16 v80.65,71.86 | J26.2 66.29,63.75 66.29,67.56 66.29,75.16
GND  (via drill 0.25, 0.51)
  Top 0.254: U1.4 17.26,18.81
  other vias: 28.73,17.98 10.39,21.79 19.56,20.07 19.56,19.05 12.78,16.69
  pour Top (isolate 0.305): 6.86,6.86 32.26,6.86 32.26,32.26 6.86,32.26
  pour Bottom (isolate 0.305): 6.86,32.26 32.26,32.26 32.26,6.86 6.86,6.86
GND1  (via drill 0.25, 0.51)
  Top 0.254: U2.4 43.17,18.81
  other vias: 54.64,17.98 36.3,21.79 45.47,20.07 45.47,19.05 38.68,16.69
  pour Top (isolate 0.305): 32.77,6.86 58.17,6.86 58.17,32.26 32.77,32.26
  pour Bottom (isolate 0.305): 32.77,32.26 58.17,32.26 58.17,6.86 32.77,6.86
GND2  (via drill 0.25, 0.51)
  Top 0.254: U3.4 69.08,18.81
  other vias: 80.54,17.98 62.2,21.79 71.37,20.07 71.37,19.05 64.59,16.69
  pour Top (isolate 0.305): 58.67,6.86 84.07,6.86 84.07,32.26 58.67,32.26
  pour Bottom (isolate 0.305): 58.67,32.26 84.07,32.26 84.07,6.86 58.67,6.86
GND3  (via drill 0.25, 0.51)
  Top 0.254: U4.4 17.26,44.72
  other vias: 28.73,43.89 10.39,47.7 19.56,45.97 19.56,44.96 12.78,42.6
  pour Top (isolate 0.305): 6.86,32.77 32.26,32.77 32.26,58.17 6.86,58.17
  pour Bottom (isolate 0.305): 6.86,58.17 32.26,58.17 32.26,32.77 6.86,32.77
GND4  (via drill 0.25, 0.51)
  Top 0.254: U5.4 43.17,44.72
  other vias: 54.64,43.89 36.3,47.7 45.47,45.97 45.47,44.96 38.68,42.6
  pour Top (isolate 0.305): 32.77,32.77 58.17,32.77 58.17,58.17 32.77,58.17
  pour Bottom (isolate 0.305): 32.77,58.17 58.17,58.17 58.17,32.77 32.77,32.77
GND5  (via drill 0.25, 0.51)
  Top 0.254: U6.4 69.08,44.72
  other vias: 80.54,43.89 62.2,47.7 71.37,45.97 71.37,44.96 64.59,42.6
  pour Top (isolate 0.305): 58.67,32.77 84.07,32.77 84.07,58.17 58.67,58.17
  pour Bottom (isolate 0.305): 58.67,58.17 84.07,58.17 84.07,32.77 58.67,32.77
GND6  (via drill 0.25, 0.51)
  Top 0.254: U7.4 17.26,70.62
  other vias: 28.73,69.8 10.39,73.61 19.56,71.88 19.56,70.87 12.78,68.5
  pour Top (isolate 0.305): 6.86,58.67 32.26,58.67 32.26,84.07 6.86,84.07
  pour Bottom (isolate 0.305): 6.86,84.07 32.26,84.07 32.26,58.67 6.86,58.67
GND7  (via drill 0.25, 0.51)
  Top 0.254: U8.4 43.17,70.62
  other vias: 54.64,69.8 36.3,73.61 45.47,71.88 45.47,70.87 38.68,68.5
  pour Top (isolate 0.305): 32.77,58.67 58.17,58.67 58.17,84.07 32.77,84.07
  pour Bottom (isolate 0.305): 32.77,84.07 58.17,84.07 58.17,58.67 32.77,58.67
GND8  (via drill 0.25, 0.51)
  Top 0.254: U9.4 69.08,70.62
  other vias: 80.54,69.8 62.2,73.61 71.37,71.88 71.37,70.87 64.59,68.5
  pour Top (isolate 0.305): 58.67,58.67 84.07,58.67 84.07,84.07 58.67,84.07
  pour Bottom (isolate 0.305): 58.67,84.07 84.07,84.07 84.07,58.67 58.67,58.67
N$1  (via drill 0.51)
  Top 0.254: R4.2 v43.23,16.69
  Bottom 0.254: v43.23,16.69 43.15,16.76 I2C1.3
N$2  (via drill 0.51)
  Top 0.254: R5.2 v43.2,14.48
  Bottom 0.254: v43.2,14.48 42.95,14.73 I2C1.1
N$3
  Top 0.254: D1.A R3.1
N$4  (via drill 0.51)
  Top 0.254: R1.2 v17.32,16.69
  Bottom 0.254: v17.32,16.69 17.25,16.76 I2C.3
N$5  (via drill 0.51)
  Top 0.254: R2.2 v17.3,14.48
  Bottom 0.254: v17.3,14.48 17.04,14.73 I2C.1
N$6
  Top 0.254: D2.A R6.1
N$7  (via drill 0.51)
  Top 0.254: v23.55,14.5 25.03,14.5 R3.2
  Bottom 0.254: LED.1 v23.55,14.5
N$8  (via drill 0.51)
  Top 0.254: v49.45,14.5 50.94,14.5 R6.2
  Bottom 0.254: LED1.1 v49.45,14.5
N$9  (via drill 0.51)
  Top 0.254: R7.2 v69.14,16.69
  Bottom 0.254: v69.14,16.69 69.06,16.76 I2C2.3
N$10  (via drill 0.51)
  Top 0.254: R8.2 v69.11,14.48
  Bottom 0.254: v69.11,14.48 68.86,14.73 I2C2.1
N$11
  Top 0.254: D3.A R9.1
N$12  (via drill 0.51)
  Top 0.254: v75.36,14.5 76.85,14.5 R9.2
  Bottom 0.254: LED2.1 v75.36,14.5
N$13  (via drill 0.51)
  Top 0.254: R10.2 v17.32,42.6
  Bottom 0.254: v17.32,42.6 17.25,42.67 I2C3.3
N$14  (via drill 0.51)
  Top 0.254: R11.2 v17.3,40.39
  Bottom 0.254: v17.3,40.39 17.04,40.64 I2C3.1
N$15
  Top 0.254: D4.A R12.1
N$16  (via drill 0.51)
  Top 0.254: v23.55,40.41 25.03,40.41 R12.2
  Bottom 0.254: LED3.1 v23.55,40.41
N$17  (via drill 0.51)
  Top 0.254: R13.2 v43.23,42.6
  Bottom 0.254: v43.23,42.6 43.15,42.67 I2C4.3
N$18  (via drill 0.51)
  Top 0.254: R14.2 v43.2,40.39
  Bottom 0.254: v43.2,40.39 42.95,40.64 I2C4.1
N$19
  Top 0.254: D5.A R15.1
N$20  (via drill 0.51)
  Top 0.254: v49.45,40.41 50.94,40.41 R15.2
  Bottom 0.254: LED4.1 v49.45,40.41
N$21  (via drill 0.51)
  Top 0.254: R16.2 v69.14,42.6
  Bottom 0.254: v69.14,42.6 69.06,42.67 I2C5.3
N$22  (via drill 0.51)
  Top 0.254: R17.2 v69.11,40.39
  Bottom 0.254: v69.11,40.39 68.86,40.64 I2C5.1
N$23
  Top 0.254: D6.A R18.1
N$24  (via drill 0.51)
  Top 0.254: v75.36,40.41 76.85,40.41 R18.2
  Bottom 0.254: LED5.1 v75.36,40.41
N$25  (via drill 0.51)
  Top 0.254: R19.2 v17.32,68.5
  Bottom 0.254: v17.32,68.5 17.25,68.58 I2C6.3
N$26  (via drill 0.51)
  Top 0.254: R20.2 v17.3,66.29
  Bottom 0.254: v17.3,66.29 17.04,66.55 I2C6.1
N$27
  Top 0.254: D7.A R21.1
N$28  (via drill 0.51)
  Top 0.254: v23.55,66.32 25.03,66.32 R21.2
  Bottom 0.254: LED6.1 v23.55,66.32
N$29  (via drill 0.51)
  Top 0.254: R22.2 v43.23,68.5
  Bottom 0.254: v43.23,68.5 43.15,68.58 I2C7.3
N$30  (via drill 0.51)
  Top 0.254: R23.2 v43.2,66.29
  Bottom 0.254: v43.2,66.29 42.95,66.55 I2C7.1
N$31
  Top 0.254: D8.A R24.1
N$32  (via drill 0.51)
  Top 0.254: v49.45,66.32 50.94,66.32 R24.2
  Bottom 0.254: LED7.1 v49.45,66.32
N$33  (via drill 0.51)
  Top 0.254: R25.2 v69.14,68.5
  Bottom 0.254: v69.14,68.5 69.06,68.58 I2C8.3
N$34  (via drill 0.51)
  Top 0.254: R26.2 v69.11,66.29
  Bottom 0.254: v69.11,66.29 68.86,66.55 I2C8.1
N$35
  Top 0.254: D9.A R27.1
N$36  (via drill 0.51)
  Top 0.254: v75.36,66.32 76.85,66.32 R27.2
  Bottom 0.254: LED8.1 v75.36,66.32
SCL  (via drill 0.51)
  Top 0.254: J1.4 25.71,21.06 v23.82,19.18 23.69,19.31 U1.6 | J2.4 13.62,18.06 16.38,15.29 16.38,14.12 17.37,13.13 v20.42,13.13 | R2.1 20.42,14.46 v20.42,13.13 | v20.42,13.13 23.37,10.18 J3.4
  Bottom 0.254: v20.42,13.13 20.42,15.14 23.82,18.54 v23.82,19.18
SCL1  (via drill 0.51)
  Top 0.254: J4.4 51.61,21.06 v49.73,19.18 49.6,19.31 U2.6 | J6.4 39.52,18.06 42.29,15.29 42.29,14.12 43.28,13.13 v46.33,13.13 | R5.1 46.33,14.46 v46.33,13.13 | v46.33,13.13 49.28,10.18 J5.4
  Bottom 0.254: v46.33,13.13 46.33,15.14 49.73,18.54 v49.73,19.18
SCL2  (via drill 0.51)
  Top 0.254: J7.4 77.52,21.06 v75.64,19.18 75.51,19.31 U3.6 | J9.4 65.43,18.06 68.2,15.29 68.2,14.12 69.19,13.13 v72.24,13.13 | R8.1 72.24,14.46 v72.24,13.13 | v72.24,13.13 75.18,10.18 J8.4
  Bottom 0.254: v72.24,13.13 72.24,15.14 75.64,18.54 v75.64,19.18
SCL3  (via drill 0.51)
  Top 0.254: J10.4 25.71,46.97 v23.82,45.08 23.69,45.22 U4.6 | J12.4 13.62,43.97 16.38,41.2 16.38,40.03 17.37,39.04 v20.42,39.04 | R11.1 20.42,40.37 v20.42,39.04 | v20.42,39.04 23.37,36.09 J11.4
  Bottom 0.254: v20.42,39.04 20.42,41.05 23.82,44.45 v23.82,45.08
SCL4  (via drill 0.51)
  Top 0.254: J13.4 51.61,46.97 v49.73,45.08 49.6,45.22 U5.6 | J15.4 39.52,43.97 42.29,41.2 42.29,40.03 43.28,39.04 v46.33,39.04 | R14.1 46.33,40.37 v46.33,39.04 | v46.33,39.04 49.28,36.09 J14.4
  Bottom 0.254: v46.33,39.04 46.33,41.05 49.73,44.45 v49.73,45.08
SCL5  (via drill 0.51)
  Top 0.254: J16.4 77.52,46.97 v75.64,45.08 75.51,45.22 U6.6 | J18.4 65.43,43.97 68.2,41.2 68.2,40.03 69.19,39.04 v72.24,39.04 | R17.1 72.24,40.37 v72.24,39.04 | v72.24,39.04 75.18,36.09 J17.4
  Bottom 0.254: v72.24,39.04 72.24,41.05 75.64,44.45 v75.64,45.08
SCL6  (via drill 0.51)
  Top 0.254: J19.4 25.71,72.87 v23.82,70.99 23.69,71.12 U7.6 | J21.4 13.62,69.87 16.38,67.11 16.38,65.94 17.37,64.95 v20.42,64.95 | R20.1 20.42,66.28 v20.42,64.95 | v20.42,64.95 23.37,62 J20.4
  Bottom 0.254: v20.42,64.95 20.42,66.95 23.82,70.36 v23.82,70.99
SCL7  (via drill 0.51)
  Top 0.254: J22.4 51.61,72.87 v49.73,70.99 49.6,71.12 U8.6 | J24.4 39.52,69.87 42.29,67.11 42.29,65.94 43.28,64.95 v46.33,64.95 | R23.1 46.33,66.28 v46.33,64.95 | v46.33,64.95 49.28,62 J23.4
  Bottom 0.254: v46.33,64.95 46.33,66.95 49.73,70.36 v49.73,70.99
SCL8  (via drill 0.51)
  Top 0.254: J25.4 77.52,72.87 v75.64,70.99 75.51,71.12 U9.6 | J27.4 65.43,69.87 68.2,67.11 68.2,65.94 69.19,64.95 v72.24,64.95 | R26.1 72.24,66.28 v72.24,64.95 | v72.24,64.95 75.18,62 J26.4
  Bottom 0.254: v72.24,64.95 72.24,66.95 75.64,70.36 v75.64,70.99
SDA
  Top 0.254: J1.3 26.26,20.06 23.69,17.49 | J3.3 20.83,9.98 19.84,10.97 13.97,10.97 10.77,14.17 10.77,18.8 11.03,19.06 J2.3 13.5,19.06 16.85,15.71 20.42,15.71 | R1.1 20.42,16.67 20.42,15.71 | 23.69,17.49 21.91,15.71 20.42,15.71 | U1.5 22.39,18.81 23.69,17.51 23.69,17.49
SDA1
  Top 0.254: J4.3 52.16,20.06 49.59,17.49 | J5.3 46.74,9.98 45.74,10.97 39.88,10.97 36.68,14.17 36.68,18.8 36.94,19.06 J6.3 39.41,19.06 42.76,15.71 46.33,15.71 | R4.1 46.33,16.67 46.33,15.71 | 49.59,17.49 47.82,15.71 46.33,15.71 | U2.5 48.3,18.81 49.59,17.51 49.59,17.49
SDA2
  Top 0.254: J7.3 78.07,20.06 75.5,17.49 | J8.3 72.64,9.98 71.65,10.97 65.79,10.97 62.59,14.17 62.59,18.8 62.85,19.06 J9.3 65.32,19.06 68.67,15.71 72.24,15.71 | R7.1 72.24,16.67 72.24,15.71 | 75.5,17.49 73.72,15.71 72.24,15.71 | U3.5 74.21,18.81 75.5,17.51 75.5,17.49
SDA3
  Top 0.254: J10.3 26.26,45.97 23.69,43.4 | J11.3 20.83,35.89 19.84,36.88 13.97,36.88 10.77,40.08 10.77,44.7 11.03,44.97 J12.3 13.5,44.97 16.85,41.62 20.42,41.62 | R10.1 20.42,42.58 20.42,41.62 | 23.69,43.4 21.91,41.62 20.42,41.62 | U4.5 22.39,44.72 23.69,43.42 23.69,43.4
SDA4
  Top 0.254: J13.3 52.16,45.97 49.59,43.4 | J14.3 46.74,35.89 45.74,36.88 39.88,36.88 36.68,40.08 36.68,44.7 36.94,44.97 J15.3 39.41,44.97 42.76,41.62 46.33,41.62 | R13.1 46.33,42.58 46.33,41.62 | 49.59,43.4 47.82,41.62 46.33,41.62 | U5.5 48.3,44.72 49.59,43.42 49.59,43.4
SDA5
  Top 0.254: J16.3 78.07,45.97 75.5,43.4 | J17.3 72.64,35.89 71.65,36.88 65.79,36.88 62.59,40.08 62.59,44.7 62.85,44.97 J18.3 65.32,44.97 68.67,41.62 72.24,41.62 | R16.1 72.24,42.58 72.24,41.62 | 75.5,43.4 73.72,41.62 72.24,41.62 | U6.5 74.21,44.72 75.5,43.42 75.5,43.4
SDA6
  Top 0.254: J19.3 26.26,71.87 23.69,69.3 | J20.3 20.83,61.8 19.84,62.79 13.97,62.79 10.77,65.99 10.77,70.61 11.03,70.87 J21.3 13.5,70.87 16.85,67.53 20.42,67.53 | R19.1 20.42,68.49 20.42,67.53 | 23.69,69.3 21.91,67.53 20.42,67.53 | U7.5 22.39,70.62 23.69,69.33 23.69,69.3
SDA7
  Top 0.254: J22.3 52.16,71.87 49.59,69.3 | J23.3 46.74,61.8 45.74,62.79 39.88,62.79 36.68,65.99 36.68,70.61 36.94,70.87 J24.3 39.41,70.87 42.76,67.53 46.33,67.53 | R22.1 46.33,68.49 46.33,67.53 | 49.59,69.3 47.82,67.53 46.33,67.53 | U8.5 48.3,70.62 49.59,69.33 49.59,69.3
SDA8
  Top 0.254: J25.3 78.07,71.87 75.5,69.3 | J26.3 72.64,61.8 71.65,62.79 65.79,62.79 62.59,65.99 62.59,70.61 62.85,70.87 J27.3 65.32,70.87 68.67,67.53 72.24,67.53 | R25.1 72.24,68.49 72.24,67.53 | 75.5,69.3 73.72,67.53 72.24,67.53 | U9.5 74.21,70.62 75.5,69.33 75.5,69.3

## Text on the board
Bottom: v10 | v10 | v10 | v10 | v10 | v10 | v10 | v10 | v10
Milling: v-score | v-score | v-score | v-score | v-score | v-score | v-score | v-score